# Altium PCB Lite Carrier for Mu.PcbDoc (part 12 of 15)
Units mm, origin at the board's own origin, x right, y up, seen from the top; angles counter-clockwise.
Board outline 146 x 102 mm, 20 copper layers (F.Cu, F.Mask, B.Cu, B.Mask, In1.Cu, F.SilkS, In2.Cu, B.SilkS, F.Adhes, B.Adhes, F.Paste, B.Paste, Dwgs.User, Cmts.User, Eco1.User, Eco2.User, Edge.Cuts, Margin, B.CrtYd, F.CrtYd); 254 components, 382 nets, 1258 pads, 1020 vias.
Unrouted connection lines stored in the file: 113.
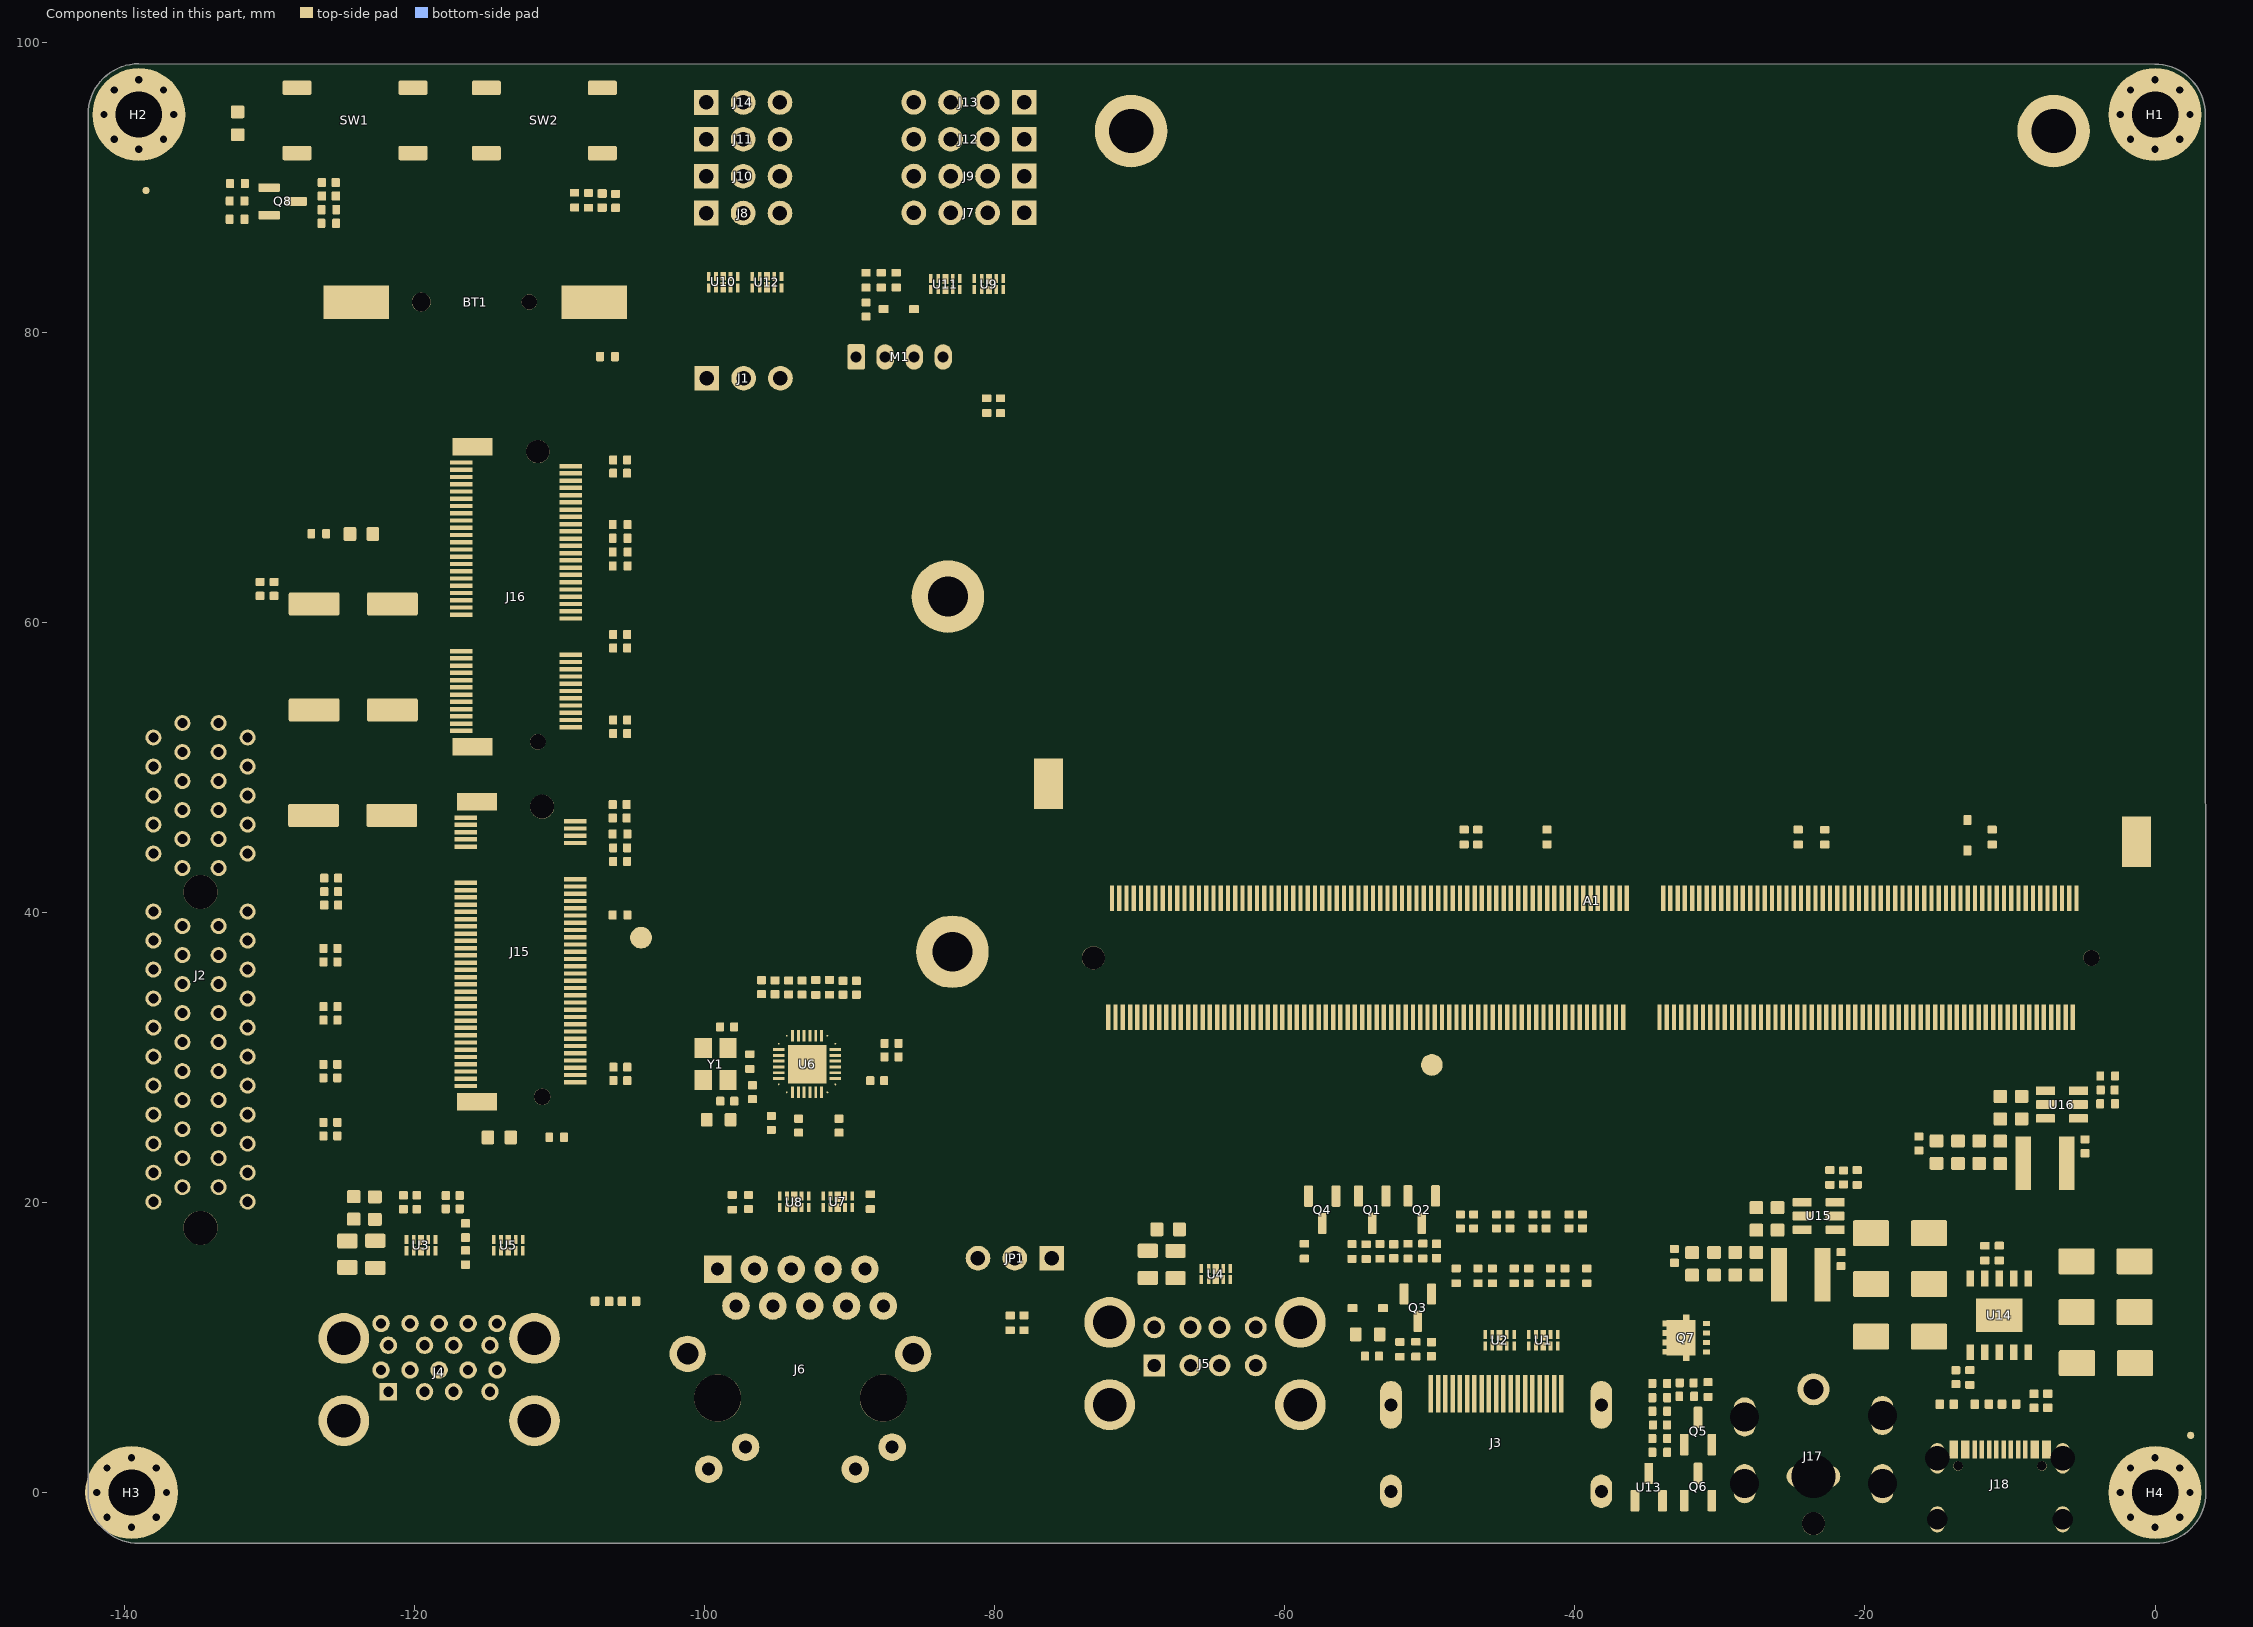
[diagram p22: the components of this part, seen from the top]

## Polygon pours and split planes (outlines as drawn) (continued)
+5V on F.Cu "F.Cu-+5V-1" (solid, remove dead copper, pour order 30970): -122.34,19.16 -126.19,19.16 -126.19,16.771 -126.18,16.77 -122.5,16.77 -122.34,16.93
+3V3 on F.Cu "F.Cu-+3V3-14" (solid, remove dead copper, pour order 30972): -9.13,23.12 -15.33,23.13 -16.1,23.58 -18.08,23.57 -18.07,21.39 -9.15,21.39 -9.14,21.38 -9.13,21.39
+15V on F.Cu "F.Cu-+15V-2" (solid, remove dead copper, pour order 30973): -8.59,2.955 -8.59,4.965 -7.455,6.1 -6.59,6.1 -6.59,6.45 -6.59,16.52 -3.47,16.49 -3.43,3.02
+12VA on F.Cu "F.Cu-+12VA" (solid, remove dead copper, pour order 30975): -33.413,23.054 -36.943,23.054 -36.95,9.1 -35.87,9.07 -32.07,9.07 -32.105,13.48 -33.41,13.48
+12VA on F.Cu "F.Cu-+12VA-2" (solid, remove dead copper, pour order 30976): 19 vertices, not listed, extent -139.1,50.5 -125.1,62.1
+3V3 on F.Cu "F.Cu-+3V3-20" (solid, remove dead copper, pour order 30977): -125.8,40.1 -125.8,48.8 -134.7,48.8 -134.7,47 -138.68,46.99 -138.68,44.09 -130.5,44.1 -129.1,44.1 -129.1,40.1
Net-(U15-SW) on F.Cu "F.Cu-Net-(U15-SW)" (solid, remove dead copper, pour order 30981): -21.47,15.995 -22.4,15.995 -22.41,16.705 -23.675,18.115 -25,18.115 -25,17.225 -23.51,15.355 -21.47,15.355
+3V3 on F.Cu "F.Cu-+3V3-78" (solid, remove dead copper, pour order 30984): -105.59,38.54 -105.59,37.54 -106.59,37.54 -106.59,38.54
+3V3 on F.Cu "F.Cu-+3V3-79" (solid, remove dead copper, pour order 30985): -91.19,38.73 -91.19,37.73 -92.19,37.73 -92.19,38.73
Net-(BT1-+) on F.Cu "F.Cu-Net-(BT1-+)-1" (solid, remove dead copper, pour order 30989): 24 vertices, not listed, extent -124.011,80.656 -121.336,82.071
GND on F.Cu "F.Cu-GND-43" (solid, remove dead copper, pour order 30993): 24 vertices, not listed, extent -86.93,92.515 -85.579,94.085
GND on F.Cu "F.Cu-GND-187" (solid, remove dead copper, pour order 30996): 24 vertices, not listed, extent -85.581,92.515 -84.23,94.085
GND on F.Cu "F.Cu-GND-94" (solid, remove dead copper, pour order 30999): 24 vertices, not listed, extent -86.928,92.515 -85.579,94.085
Net-(J6-CT) on F.Cu "F.Cu-Net-(J6-CT)-1" (solid, remove dead copper, pour order 31002): 24 vertices, not listed, extent -100.055,15.399 -98.155,16.85
Net-(J5-VBUS1) on F.Cu "F.Cu-Net-(J5-VBUS1)" (solid, remove dead copper, pour order 31005): 24 vertices, not listed, extent -69.311,8.452 -67.72,10.043
{\P\W\R\_\L\E\D\}\{\s\l\a\s\h\}\{PSON} on F.Cu "F.Cu-/~{PWR_LED}{slash}~{PSON}-5" (solid, remove dead copper, pour order 31008): 24 vertices, not listed, extent -77.327,14.903 -75.718,16.512
I2C2_SDA on F.Cu "F.Cu-/GPIO/I2C2_SDA-1" (solid, remove dead copper, pour order 31011): 24 vertices, not listed, extent -79.207,86.963 -77.598,88.572
GND on F.Cu "F.Cu-GND-113" (solid, remove dead copper, pour order 31014): 24 vertices, not listed, extent -99.881,92.44 -98.53,94.14
+12VA on F.Cu "F.Cu-+12VA-1" (solid, remove dead copper, pour order 31017): 24 vertices, not listed, extent -127.845,61.259 -126.228,62.56
MDI1- on F.Cu "F.Cu-/Gigabit Ethernet/MDI1--1" (solid, remove dead copper, pour order 31020): 24 vertices, not listed, extent -94.975,14.272 -93.661,15.4
SOC_UART0_RX on F.Cu "F.Cu-/GPIO/SOC_UART0_RX" (solid, remove dead copper, pour order 31023): 24 vertices, not listed, extent -100.63,86.86 -99.03,88.211
MDI1+ on F.Cu "F.Cu-/Gigabit Ethernet/MDI1+-1" (solid, remove dead copper, pour order 31026): 24 vertices, not listed, extent -96.173,12.859 -94.623,14.288
MDI2+ on F.Cu "F.Cu-/Gigabit Ethernet/MDI2+-1" (solid, remove dead copper, pour order 31029): 24 vertices, not listed, extent -93.633,12.859 -92.083,14.286
Net-(J5-VBUS2) on F.Cu "F.Cu-Net-(J5-VBUS2)-1" (solid, remove dead copper, pour order 31032): 24 vertices, not listed, extent -69.693,11.381 -68.307,12.632
GND on F.Cu "F.Cu-GND-102" (solid, remove dead copper, pour order 31035): 24 vertices, not listed, extent -62.693,11.381 -61.307,12.632
GND on F.Cu "F.Cu-GND-166" (solid, remove dead copper, pour order 31038): 24 vertices, not listed, extent -62.693,8.761 -61.307,10.012
GND on F.Cu "F.Cu-GND-96" (solid, remove dead copper, pour order 31041): 24 vertices, not listed, extent -62.693,10.132 -61.307,11.383
Net-(D26-A) on F.Cu "F.Cu-Net-(D26-A)-2" (solid, remove dead copper, pour order 31044): 24 vertices, not listed, extent -86.138,78.289 -84.962,79.653
+5V on F.Cu "F.Cu-+5V-12" (solid, remove dead copper, pour order 31047): 24 vertices, not listed, extent -88.138,78.289 -86.962,79.653
Net-(J4A-VBUS1) on F.Cu "F.Cu-Net-(J4A-VBUS1)" (solid, remove dead copper, pour order 31050): 24 vertices, not listed, extent -122.4,5.85 -121.2,6.951
Net-(J6-PadL3) on F.Cu "F.Cu-Net-(J6-PadL3)-1" (solid, remove dead copper, pour order 31053): 24 vertices, not listed, extent -97.176,3.129 -96.079,4.226
Net-(J6-PadL1) on F.Cu "F.Cu-Net-(J6-PadL1)-1" (solid, remove dead copper, pour order 31056): 24 vertices, not listed, extent -87.066,3.129 -85.969,4.226
Net-(J4B-VBUS2) on F.Cu "F.Cu-Net-(J4B-VBUS2)" (solid, remove dead copper, pour order 31059): 24 vertices, not listed, extent -122.924,9.376 -121.57,10.574
MDI2- on F.Cu "F.Cu-/Gigabit Ethernet/MDI2--1" (solid, remove dead copper, pour order 31062): 24 vertices, not listed, extent -92.363,14.262 -91.121,15.4
+5V on F.Cu "F.Cu-+5V-4" (solid, remove dead copper, pour order 31065): 24 vertices, not listed, extent -87.551,77.264 -86.524,78.548
{\P\L\T\_\R\S\T\}\ on F.Cu "F.Cu-/~{PLT_RST}-2" (solid, remove dead copper, pour order 31068): 24 vertices, not listed, extent -51.11,28.787 -49.859,30.173
{\P\L\T\_\R\S\T\}\ on F.Cu "F.Cu-/~{PLT_RST}-1" (solid, remove dead copper, pour order 31071): 24 vertices, not listed, extent -49.861,28.787 -48.61,30.173
MDI3+ on F.Cu "F.Cu-/Gigabit Ethernet/MDI3+" (solid, remove dead copper, pour order 31074): 24 vertices, not listed, extent -90.887,12.859 -89.543,14.31
MDI0+ on F.Cu "F.Cu-/Gigabit Ethernet/MDI0+" (solid, remove dead copper, pour order 31077): 24 vertices, not listed, extent -98.507,12.859 -97.163,14.292
MDI3- on F.Cu "F.Cu-/Gigabit Ethernet/MDI3-" (solid, remove dead copper, pour order 31080): 24 vertices, not listed, extent -90.006,14.45 -88.944,15.4
MDI0- on F.Cu "F.Cu-/Gigabit Ethernet/MDI0--1" (solid, remove dead copper, pour order 31083): 24 vertices, not listed, extent -97.515,14.332 -96.564,15.4
Net-(D25-A2) on F.Cu "F.Cu-Net-(D25-A2)-4" (solid, remove dead copper, pour order 31086): 24 vertices, not listed, extent -108.55,91.859 -107.049,92.821
Net-(D25-A2) on F.Cu "F.Cu-Net-(D25-A2)-1" (solid, remove dead copper, pour order 31089): 24 vertices, not listed, extent -115.051,91.859 -113.55,92.821
CON_USB1_D_P on F.Cu "F.Cu-/USB2.0&USB3.0/CON_USB1_D_P" (solid, remove dead copper, pour order 31092): 24 vertices, not listed, extent -65.449,8.475 -64.5,9.654
CON_USB2_D_P on F.Cu "F.Cu-/USB2.0&USB3.0/CON_USB2_D_P-2" (solid, remove dead copper, pour order 31095): 24 vertices, not listed, extent -65.449,11.095 -64.5,12.274
CON_USB2_D_N on F.Cu "F.Cu-/USB2.0&USB3.0/CON_USB2_D_N-4" (solid, remove dead copper, pour order 31098): 24 vertices, not listed, extent -66.5,11.095 -65.551,12.274
CON_USB1_D_N on F.Cu "F.Cu-/USB2.0&USB3.0/CON_USB1_D_N-4" (solid, remove dead copper, pour order 31101): 24 vertices, not listed, extent -66.5,8.475 -65.551,9.654
Net-(U6-CKXTAL1) on F.Cu "F.Cu-Net-(U6-CKXTAL1)" (solid, remove dead copper, pour order 31104): 24 vertices, not listed, extent -100.234,29.633 -99.078,30.888
GND on F.Cu "F.Cu-GND-68" (solid, remove dead copper, pour order 31107): 24 vertices, not listed, extent -101.109,28.17 -99.969,29.359
I2C5_SCL on F.Cu "F.Cu-/GPIO/I2C5_SCL-2" (solid, remove dead copper, pour order 31110): 24 vertices, not listed, extent -86.93,90.159 -85.569,91.361
SOC_UART2_RX on F.Cu "F.Cu-/GPIO/SOC_UART2_RX-2" (solid, remove dead copper, pour order 31113): 24 vertices, not listed, extent -95.808,87.202 -94.799,88.211
I2C4_SCL on F.Cu "F.Cu-/GPIO/I2C4_SCL-4" (solid, remove dead copper, pour order 31116): 24 vertices, not listed, extent -84.038,89.752 -83.029,90.761
SLS_S3 on F.Cu "F.Cu-/LattePanda Module/SLS_S3" (solid, remove dead copper, pour order 31119): 24 vertices, not listed, extent -82.158,15.152 -81.149,16.161
SOC_UART1_RX on F.Cu "F.Cu-/GPIO/SOC_UART1_RX-2" (solid, remove dead copper, pour order 31122): 24 vertices, not listed, extent -98.348,87.202 -97.339,88.211
SOC_UART2_TX on F.Cu "F.Cu-/GPIO/SOC_UART2_TX-4" (solid, remove dead copper, pour order 31125): 24 vertices, not listed, extent -94.801,90.149 -93.45,91.351
I2C3_SDA on F.Cu "F.Cu-/GPIO/I2C3_SDA-2" (solid, remove dead copper, pour order 31128): 24 vertices, not listed, extent -81.091,86.87 -79.889,88.221
SOC_UART1_TX on F.Cu "F.Cu-/GPIO/SOC_UART1_TX-4" (solid, remove dead copper, pour order 31131): 24 vertices, not listed, extent -97.341,89.742 -96.332,90.751
I2C4_SDA on F.Cu "F.Cu-/GPIO/I2C4_SDA-1" (solid, remove dead copper, pour order 31134): 24 vertices, not listed, extent -83.031,87.212 -82.022,88.221
I2C5_SDA on F.Cu "F.Cu-/GPIO/I2C5_SDA-2" (solid, remove dead copper, pour order 31137): 24 vertices, not listed, extent -85.571,87.212 -84.562,88.221
Net-(J15-DEVSLP) on F.Cu "F.Cu-Net-(J15-DEVSLP)" (solid, remove dead copper, pour order 31140): 24 vertices, not listed, extent -105.311,37.963 -104.379,39.12
Net-(D21-A2) on F.Cu "F.Cu-Net-(D21-A2)-2" (solid, remove dead copper, pour order 31143): 24 vertices, not listed, extent -121.6,91.859 -120.099,92.821
Net-(D21-A2) on F.Cu "F.Cu-Net-(D21-A2)-4" (solid, remove dead copper, pour order 31146): 24 vertices, not listed, extent -128.101,91.859 -126.6,92.821
GND on F.Cu "F.Cu-GND-176" (solid, remove dead copper, pour order 31149): 24 vertices, not listed, extent -7.328,2.074 -6.369,3.255
GND on F.Cu "F.Cu-GND-132" (solid, remove dead copper, pour order 31152): 24 vertices, not listed, extent -15.011,2.079 -14.063,3.255
+5V on F.Cu "F.Cu-+5V-2" (solid, remove dead copper, pour order 31155): 24 vertices, not listed, extent -68.717,16.17 -67.529,17.09
+5V on F.Cu "F.Cu-+5V" (solid, remove dead copper, pour order 31158): 24 vertices, not listed, extent -69.441,16.18 -68.253,17.094
GND on F.Cu "F.Cu-GND-150" (solid, remove dead copper, pour order 31161): 24 vertices, not listed, extent -116.489,51.409 -115.266,52.51
Net-(D21-A2) on F.Cu "F.Cu-Net-(D21-A2)-1" (solid, remove dead copper, pour order 31164): 24 vertices, not listed, extent -128.282,91.433 -127.033,92.341
Net-(M1-PWM) on F.Cu "F.Cu-Net-(M1-PWM)-1" (solid, remove dead copper, pour order 31167): 24 vertices, not listed, extent -83.883,77 -82.962,78.291
Net-(J5-VBUS2) on F.Cu "F.Cu-Net-(J5-VBUS2)" (solid, remove dead copper, pour order 31170): 24 vertices, not listed, extent -69.755,13.818 -68.75,14.794
+5V on F.Cu "F.Cu-+5V-6" (solid, remove dead copper, pour order 31173): 24 vertices, not listed, extent -69.762,16.666 -68.763,17.642
Net-(D25-A2) on F.Cu "F.Cu-Net-(D25-A2)-2" (solid, remove dead copper, pour order 31176): 24 vertices, not listed, extent -108.043,91.416 -106.843,92.341
GND on F.Cu "F.Cu-GND-157" (solid, remove dead copper, pour order 31179): 24 vertices, not listed, extent -115.9,6.396 -114.799,7.504
GND on F.Cu "F.Cu-GND-30" (solid, remove dead copper, pour order 31182): 24 vertices, not listed, extent -98.985,30.639 -97.899,31.828
+5V on F.Cu "F.Cu-+5V-7" (solid, remove dead copper, pour order 31185): 24 vertices, not listed, extent -69.275,17.215 -68.449,18.191
CON_USB4_SSTX_N on F.Cu "F.Cu-/USB2.0&USB3.0/CON_USB4_SSTX_N-2" (solid, remove dead copper, pour order 31188): 24 vertices, not listed, extent -121.138,11.42 -120.07,12.488
CON_USB4_SSRX_N on F.Cu "F.Cu-/USB2.0&USB3.0/CON_USB4_SSRX_N-3" (solid, remove dead copper, pour order 31191): 24 vertices, not listed, extent -115.138,11.42 -114.07,12.488
CON_USB4_SSRX_P on F.Cu "F.Cu-/USB2.0&USB3.0/CON_USB4_SSRX_P-2" (solid, remove dead copper, pour order 31194): 24 vertices, not listed, extent -116.53,11.42 -115.462,12.488
CON_USB4_SSTX_P on F.Cu "F.Cu-/USB2.0&USB3.0/CON_USB4_SSTX_P-4" (solid, remove dead copper, pour order 31196): 24 vertices, not listed, extent -122.53,11.42 -121.462,12.488
CON_USB3_D_P on F.Cu "F.Cu-/USB2.0&USB3.0/CON_USB3_D_P-2" (solid, remove dead copper, pour order 31198): 24 vertices, not listed, extent -118.138,6.112 -117.07,7.18
CON_USB3_D_N on F.Cu "F.Cu-/USB2.0&USB3.0/CON_USB3_D_N-2" (solid, remove dead copper, pour order 31200): 24 vertices, not listed, extent -119.53,6.112 -118.462,7.18
Net-(U6-CKXTAL2) on F.Cu "F.Cu-Net-(U6-CKXTAL2)-2" (solid, remove dead copper, pour order 31202): 24 vertices, not listed, extent -98.771,27.24 -97.785,28.441
Net-(J5-VBUS1) on F.Cu "F.Cu-Net-(J5-VBUS1)-1" (solid, remove dead copper, pour order 31204): 24 vertices, not listed, extent -68.017,13.808 -67.042,14.783
Net-(U6-CKXTAL2) on F.Cu "F.Cu-Net-(U6-CKXTAL2)-1" (solid, remove dead copper, pour order 31206): 24 vertices, not listed, extent -98.386,28.081 -97.285,29.14
REFCLK2- on F.Cu "F.Cu-/LattePanda Module/REFCLK2-" (solid, remove dead copper, pour order 31208): 24 vertices, not listed, extent -131.71,37.84 -130.752,38.863
REFCLK2+ on F.Cu "F.Cu-/LattePanda Module/REFCLK2+-2" (solid, remove dead copper, pour order 31210): 24 vertices, not listed, extent -133.501,38.542 -132.45,39.558
5V_HDMI_VCC on F.Cu "F.Cu-5V_HDMI_VCC" (solid, remove dead copper, pour order 31212): 24 vertices, not listed, extent -53.758,10.848 -52.981,11.77
PCIE30_TX1_N on F.Cu "F.Cu-/PCIe x4/PCIE30_TX1_N" (solid, remove dead copper, pour order 31214): 24 vertices, not listed, extent -138.001,31.542 -136.97,32.558
Net-(J3-+5V) on F.Cu "F.Cu-Net-(J3-+5V)" (solid, remove dead copper, pour order 31216): 24 vertices, not listed, extent -55.238,10.02 -54.355,11.043
GND on F.Cu "F.Cu-GND-126" (solid, remove dead copper, pour order 31218): 24 vertices, not listed, extent -118.301,7.896 -117.246,8.874
CON_USB4_D_N on F.Cu "F.Cu-/USB2.0&USB3.0/CON_USB4_D_N" (solid, remove dead copper, pour order 31220): 24 vertices, not listed, extent -119.854,10.149 -118.876,11.228
CON_USB4_D_P on F.Cu "F.Cu-/USB2.0&USB3.0/CON_USB4_D_P-2" (solid, remove dead copper, pour order 31222): 24 vertices, not listed, extent -118.364,9.726 -117.299,10.704
Net-(D23-A) on F.Cu "F.Cu-Net-(D23-A)" (solid, remove dead copper, pour order 31224): 24 vertices, not listed, extent -125.323,65.65 -124.446,66.525
5V_HDMI_VCC on F.Cu "F.Cu-5V_HDMI_VCC-1" (solid, remove dead copper, pour order 31226): 24 vertices, not listed, extent -53.845,10.025 -53.075,10.901
Net-(D22-K) on F.Cu "F.Cu-Net-(D22-K)" (solid, remove dead copper, pour order 31228): 24 vertices, not listed, extent -132.371,92.834 -131.421,93.746
Net-(D9-K) on F.Cu "F.Cu-Net-(D9-K)-1" (solid, remove dead copper, pour order 31230): 24 vertices, not listed, extent -115.055,24.278 -114.132,25.178
PCIE30_TX0_P on F.Cu "F.Cu-/PCIe x4/PCIE30_TX0_P-1" (solid, remove dead copper, pour order 31232): 24 vertices, not listed, extent -138.001,37.661 -136.98,38.558
PCIE30_TX2_N on F.Cu "F.Cu-/PCIe x4/PCIE30_TX2_N" (solid, remove dead copper, pour order 31234): 24 vertices, not listed, extent -138.001,27.542 -136.983,28.439
PCIE30_TX3_N on F.Cu "F.Cu-/PCIe x4/PCIE30_TX3_N-1" (solid, remove dead copper, pour order 31236): 24 vertices, not listed, extent -138.001,23.542 -136.987,24.439
PCIE30_TX0_N on F.Cu "F.Cu-/PCIe x4/PCIE30_TX0_N-1" (solid, remove dead copper, pour order 31238): 24 vertices, not listed, extent -136.968,36.661 -135.999,37.558
Net-(D9-A) on F.Cu "F.Cu-Net-(D9-A)" (solid, remove dead copper, pour order 31240): 24 vertices, not listed, extent -113.363,24.042 -112.487,24.917
GND on F.Cu "F.Cu-GND-77" (solid, remove dead copper, pour order 31242): 24 vertices, not listed, extent -5.344,26.226 -4.27,26.786
PCIE30_TX2_P on F.Cu "F.Cu-/PCIe x4/PCIE30_TX2_P-1" (solid, remove dead copper, pour order 31244): 24 vertices, not listed, extent -136.905,28.542 -135.999,29.439
Net-(D22-A) on F.Cu "F.Cu-Net-(D22-A)-1" (solid, remove dead copper, pour order 31246): 24 vertices, not listed, extent -133.102,94.757 -132.189,95.598
PCIE30_TX1_P on F.Cu "F.Cu-/PCIe x4/PCIE30_TX1_P-1" (solid, remove dead copper, pour order 31248): 24 vertices, not listed, extent -136.878,32.542 -135.999,33.439
PCIE30_TX3_P on F.Cu "F.Cu-/PCIe x4/PCIE30_TX3_P-1" (solid, remove dead copper, pour order 31250): 24 vertices, not listed, extent -136.843,24.542 -135.999,25.439
Net-(Q5-D) on F.Cu "F.Cu-Net-(Q5-D)-1" (solid, remove dead copper, pour order 31252): 24 vertices, not listed, extent -31.644,5.145 -31.196,6.217
Net-(Q5-G) on F.Cu "F.Cu-Net-(Q5-G)-3" (solid, remove dead copper, pour order 31254): 24 vertices, not listed, extent -32.762,3.272 -32.317,4.342
Net-(Q4-D) on F.Cu "F.Cu-Net-(Q4-D)-3" (solid, remove dead copper, pour order 31256): 24 vertices, not listed, extent -57.703,17.393 -57.129,18.563
DDC_SCL on F.Cu "F.Cu-/HDMI/DDC_SCL-1" (solid, remove dead copper, pour order 31258): 24 vertices, not listed, extent -50.849,17.535 -50.271,18.573
Net-(Q1-D) on F.Cu "F.Cu-Net-(Q1-D)-1" (solid, remove dead copper, pour order 31260): 24 vertices, not listed, extent -54.259,17.532 -53.681,18.571
DDI_B_HPD on F.Cu "F.Cu-/HDMI/DDI_B_HPD" (solid, remove dead copper, pour order 31262): 24 vertices, not listed, extent -55.209,19.407 -54.631,20.446
Net-(U13-K) on F.Cu "F.Cu-Net-(U13-K)" (solid, remove dead copper, pour order 31264): 24 vertices, not listed, extent -36.135,-0.566 -35.571,0.473
DDI_B_DDC_SCL on F.Cu "F.Cu-/HDMI/DDI_B_DDC_SCL" (solid, remove dead copper, pour order 31266): 24 vertices, not listed, extent -51.799,20.446 -51.221,21.485
DDI_B_DDC_SCL on F.Cu "F.Cu-/HDMI/DDI_B_DDC_SCL-1" (solid, remove dead copper, pour order 31268): 24 vertices, not listed, extent -51.799,19.41 -51.221,20.448
DDC_SDA on F.Cu "F.Cu-/HDMI/DDC_SDA-2" (solid, remove dead copper, pour order 31270): 24 vertices, not listed, extent -51.124,10.775 -50.546,11.813
PWR_EN on F.Cu "F.Cu-/PSU/PWR_EN-7" (solid, remove dead copper, pour order 31272): 24 vertices, not listed, extent -32.749,-0.556 -32.171,0.483
+3V3 on F.Cu "F.Cu-+3V3-53" (solid, remove dead copper, pour order 31274): 24 vertices, not listed, extent -49.899,20.446 -49.321,21.485
Net-(U13-REF) on F.Cu "F.Cu-Net-(U13-REF)-1" (solid, remove dead copper, pour order 31276): 24 vertices, not listed, extent -34.249,-0.566 -33.671,0.473
+3V3 on F.Cu "F.Cu-+3V3-22" (solid, remove dead copper, pour order 31278): 24 vertices, not listed, extent -49.899,19.41 -49.321,20.448
+3V3 on F.Cu "F.Cu-+3V3-56" (solid, remove dead copper, pour order 31280): 24 vertices, not listed, extent -53.309,19.407 -52.731,20.446
+3V3 on F.Cu "F.Cu-+3V3-31" (solid, remove dead copper, pour order 31282): 24 vertices, not listed, extent -50.174,12.65 -49.596,13.688
Net-(U6-RSET) on F.Cu "F.Cu-Net-(U6-RSET)" (solid, remove dead copper, pour order 31284): 24 vertices, not listed, extent -98.211,25.3 -97.41,26.1
DDI_B_DDC_SDA on F.Cu "F.Cu-/HDMI/DDI_B_DDC_SDA-1" (solid, remove dead copper, pour order 31286): 24 vertices, not listed, extent -52.074,12.65 -51.517,13.688
Net-(Q5-S) on F.Cu "F.Cu-Net-(Q5-S)" (solid, remove dead copper, pour order 31288): 24 vertices, not listed, extent -30.816,2.196 -30.271,3.303
HPD on F.Cu "F.Cu-/HDMI/HPD-4" (solid, remove dead copper, pour order 31290): 24 vertices, not listed, extent -50.234,6.797 -49.929,8.299
Net-(U16-FB) on F.Cu "F.Cu-Net-(U16-FB)-2" (solid, remove dead copper, pour order 31292): 24 vertices, not listed, extent -5.283,27.433 -4.32,27.986
Net-(U15-FB) on F.Cu "F.Cu-Net-(U15-FB)-2" (solid, remove dead copper, pour order 31294): 24 vertices, not listed, extent -22.187,20.014 -21.409,20.669
GND on F.Cu "F.Cu-GND-121" (solid, remove dead copper, pour order 31296): 24 vertices, not listed, extent -34.911,1.186 -34.259,1.996
GND on F.Cu "F.Cu-GND-158" (solid, remove dead copper, pour order 31298): 24 vertices, not listed, extent -35.175,4.045 -34.511,4.769
+3V3 on F.Cu "F.Cu-+3V3-64" (solid, remove dead copper, pour order 31300): 24 vertices, not listed, extent -106.92,45.91 -106.244,46.616
Net-(J6-CT) on F.Cu "F.Cu-Net-(J6-CT)" (solid, remove dead copper, pour order 31302): 24 vertices, not listed, extent -97.56,18.96 -96.854,19.636
+5V on F.Cu "F.Cu-+5V-8" (solid, remove dead copper, pour order 31304): 24 vertices, not listed, extent -88.261,80.989 -87.546,81.629
+5V on F.Cu "F.Cu-+5V-10" (solid, remove dead copper, pour order 31306): 24 vertices, not listed, extent -87.774,81.551 -87.059,82.191
GND on F.Cu "F.Cu-GND-45" (solid, remove dead copper, pour order 31308): 24 vertices, not listed, extent -105.446,46.377 -104.764,47.066
Net-(D26-A) on F.Cu "F.Cu-Net-(D26-A)-1" (solid, remove dead copper, pour order 31310): 24 vertices, not listed, extent -86.891,83.533 -86.173,84.169
Net-(U16-BOOST) on F.Cu "F.Cu-Net-(U16-BOOST)-1" (solid, remove dead copper, pour order 31312): 24 vertices, not listed, extent -5.421,25.261 -4.63,25.799
Net-(U15-BOOST) on F.Cu "F.Cu-Net-(U15-BOOST)-1" (solid, remove dead copper, pour order 31314): 24 vertices, not listed, extent -22.218,17.553 -21.47,18.116
GND on F.Cu "F.Cu-GND-120" (solid, remove dead copper, pour order 31316): 24 vertices, not listed, extent -125.54,40.502 -124.98,41.093
+3V3 on F.Cu "F.Cu-+3V3-37" (solid, remove dead copper, pour order 31318): 24 vertices, not listed, extent -126.5,40.502 -125.94,41.093
GND on F.Cu "F.Cu-GND-12" (solid, remove dead copper, pour order 31320): 24 vertices, not listed, extent -105.65,46.499 -105.09,47.09
+3V3 on F.Cu "F.Cu-+3V3-24" (solid, remove dead copper, pour order 31322): 24 vertices, not listed, extent -106.58,52.329 -106.02,52.92
+3V3 on F.Cu "F.Cu-+3V3-55" (solid, remove dead copper, pour order 31324): 24 vertices, not listed, extent -126.5,41.76 -125.94,42.351
+3V3 on F.Cu "F.Cu-+3V3-57" (solid, remove dead copper, pour order 31326): 24 vertices, not listed, extent -106.58,52.67 -106.02,53.261
+3V3 on F.Cu "F.Cu-+3V3-43" (solid, remove dead copper, pour order 31328): 24 vertices, not listed, extent -106.61,46.499 -106.05,47.09
+3V3 on F.Cu "F.Cu-+3V3-7" (solid, remove dead copper, pour order 31330): 24 vertices, not listed, extent -106.57,28.73 -106.01,29.321
+3V3 on F.Cu "F.Cu-+3V3-21" (solid, remove dead copper, pour order 31332): 24 vertices, not listed, extent -106.57,28.399 -106.01,28.99
GND on F.Cu "F.Cu-GND-83" (solid, remove dead copper, pour order 31334): 24 vertices, not listed, extent -105.65,46.84 -105.09,47.431
GND on F.Cu "F.Cu-GND-178" (solid, remove dead copper, pour order 31336): 24 vertices, not listed, extent -125.54,41.76 -124.98,42.351
Net-(Q8-G) on F.Cu "F.Cu-Net-(Q8-G)" (solid, remove dead copper, pour order 31338): 24 vertices, not listed, extent -131.047,89.671 -130.019,90.149
DDI_B_HPD on F.Cu "F.Cu-/HDMI/DDI_B_HPD-4" (solid, remove dead copper, pour order 31340): 24 vertices, not listed, extent -54.921,20.321 -54.334,21.131
DDI_B_DDC_SDA on F.Cu "F.Cu-/HDMI/DDI_B_DDC_SDA" (solid, remove dead copper, pour order 31342): 24 vertices, not listed, extent -51.786,13.542 -51.194,14.3
+5V on F.Cu "F.Cu-+5V-5" (solid, remove dead copper, pour order 31344): 24 vertices, not listed, extent -88.871,80.8 -88.28,81.36
Net-(Q5-S) on F.Cu "F.Cu-Net-(Q5-S)-1" (solid, remove dead copper, pour order 31346): 24 vertices, not listed, extent -31.511,1.196 -30.927,2.006
Net-(J3-+5V) on F.Cu "F.Cu-Net-(J3-+5V)-1" (solid, remove dead copper, pour order 31348): 24 vertices, not listed, extent -49.58,5.355 -49.28,6.806
FAN_1_TAC on F.Cu "F.Cu-/Fan_Temp/FAN_1_TAC-2" (solid, remove dead copper, pour order 31350): 24 vertices, not listed, extent -88.41,82.8 -87.819,83.34
Net-(D26-A) on F.Cu "F.Cu-Net-(D26-A)-4" (solid, remove dead copper, pour order 31352): 24 vertices, not listed, extent -87.38,83.82 -86.789,84.36
Net-(U15-FB) on F.Cu "F.Cu-Net-(U15-FB)-1" (solid, remove dead copper, pour order 31354): 24 vertices, not listed, extent -21.13,20.94 -20.539,21.48
+5V on F.Cu "F.Cu-+5V-9" (solid, remove dead copper, pour order 31356): 24 vertices, not listed, extent -22.421,21.96 -21.83,22.5
Net-(U15-FB) on F.Cu "F.Cu-Net-(U15-FB)" (solid, remove dead copper, pour order 31358): 24 vertices, not listed, extent -22.421,20.94 -21.83,21.48
Net-(D26-A) on F.Cu "F.Cu-Net-(D26-A)-3" (solid, remove dead copper, pour order 31360): 24 vertices, not listed, extent -87.821,83.82 -87.23,84.36
Net-(U14-VBUS) on F.Cu "F.Cu-Net-(U14-VBUS)" (solid, remove dead copper, pour order 31362): 24 vertices, not listed, extent -10.995,14.769 -10.485,15.575
Net-(U14-CFG1) on F.Cu "F.Cu-Net-(U14-CFG1)" (solid, remove dead copper, pour order 31364): 24 vertices, not listed, extent -11.995,14.769 -11.485,15.575
Net-(U14-VDD) on F.Cu "F.Cu-Net-(U14-VDD)-3" (solid, remove dead copper, pour order 31366): 24 vertices, not listed, extent -12.995,8.865 -12.485,9.671
TMDS_D2- on F.Cu "F.Cu-/HDMI/TMDS_D2--2" (solid, remove dead copper, pour order 31368): 24 vertices, not listed, extent -42.08,6.804 -41.78,8.255
TMDS_D0- on F.Cu "F.Cu-/HDMI/TMDS_D0--2" (solid, remove dead copper, pour order 31370): 24 vertices, not listed, extent -45.08,6.804 -44.78,8.255
TMDS_CK- on F.Cu "F.Cu-/HDMI/TMDS_CK--7" (solid, remove dead copper, pour order 31372): 24 vertices, not listed, extent -46.58,6.804 -46.28,8.255
TMDS_D0+ on F.Cu "F.Cu-/HDMI/TMDS_D0+" (solid, remove dead copper, pour order 31374): 24 vertices, not listed, extent -44.08,6.804 -43.78,8.255
TMDS_D1- on F.Cu "F.Cu-/HDMI/TMDS_D1--5" (solid, remove dead copper, pour order 31376): 24 vertices, not listed, extent -43.58,6.804 -43.28,8.255
TMDS_CK+ on F.Cu "F.Cu-/HDMI/TMDS_CK+-3" (solid, remove dead copper, pour order 31378): 24 vertices, not listed, extent -45.58,6.804 -45.28,8.255
DDC_SDA on F.Cu "F.Cu-/HDMI/DDC_SDA-1" (solid, remove dead copper, pour order 31380): 24 vertices, not listed, extent -48.58,6.804 -48.28,8.255
TMDS_D2+ on F.Cu "F.Cu-/HDMI/TMDS_D2+" (solid, remove dead copper, pour order 31381): 24 vertices, not listed, extent -41.08,6.804 -40.78,8.255
TMDS_D1+ on F.Cu "F.Cu-/HDMI/TMDS_D1+" (solid, remove dead copper, pour order 31382): 24 vertices, not listed, extent -42.58,6.804 -42.28,8.255
GND on F.Cu "F.Cu-GND-175" (solid, remove dead copper, pour order 31383): 24 vertices, not listed, extent -49.08,6.804 -48.78,8.255
DDC_SCL on F.Cu "F.Cu-/HDMI/DDC_SCL" (solid, remove dead copper, pour order 31384): 24 vertices, not listed, extent -48.08,6.804 -47.78,8.255
GND on F.Cu "F.Cu-GND-137" (solid, remove dead copper, pour order 31385): 24 vertices, not listed, extent -43.08,5.355 -42.78,6.806
GND on F.Cu "F.Cu-GND-14" (solid, remove dead copper, pour order 31386): 24 vertices, not listed, extent -44.58,5.355 -44.28,6.806
GND on F.Cu "F.Cu-GND-125" (solid, remove dead copper, pour order 31387): 24 vertices, not listed, extent -46.08,5.355 -45.78,6.806
GND on F.Cu "F.Cu-GND-141" (solid, remove dead copper, pour order 31388): 24 vertices, not listed, extent -49.08,5.355 -48.78,6.806
GND on F.Cu "F.Cu-GND-170" (solid, remove dead copper, pour order 31389): 24 vertices, not listed, extent -41.58,5.355 -41.28,6.806
+3V3 on F.Cu "F.Cu-+3V3-40" (solid, remove dead copper, pour order 31390): 24 vertices, not listed, extent -106.85,28.08 -106.289,28.629
CC1 on F.Cu "F.Cu-/PSU/CC1-4" (solid, remove dead copper, pour order 31391): 24 vertices, not listed, extent -9.995,14.769 -9.485,15.575
CC2 on F.Cu "F.Cu-/PSU/CC2-3" (solid, remove dead copper, pour order 31392): 24 vertices, not listed, extent -8.995,13.965 -8.485,14.771
PWR_C_D- on F.Cu "F.Cu-/PSU/PWR_C_D--3" (solid, remove dead copper, pour order 31393): 24 vertices, not listed, extent -8.995,8.865 -8.485,9.671
PWR_C_D+ on F.Cu "F.Cu-/PSU/PWR_C_D+-1" (solid, remove dead copper, pour order 31394): 24 vertices, not listed, extent -9.995,8.865 -9.485,9.671
GND on F.Cu "F.Cu-GND-165" (solid, remove dead copper, pour order 31395): 24 vertices, not listed, extent -35.041,4.58 -34.477,5.251
Net-(U15-BOOST) on F.Cu "F.Cu-Net-(U15-BOOST)" (solid, remove dead copper, pour order 31396): 24 vertices, not listed, extent -21.944,16.569 -21.384,17.13
GND on F.Cu "F.Cu-GND-50" (solid, remove dead copper, pour order 31397): 24 vertices, not listed, extent -96.975,26.56 -96.415,27.121
Net-(U16-BOOST) on F.Cu "F.Cu-Net-(U16-BOOST)" (solid, remove dead copper, pour order 31398): 24 vertices, not listed, extent -5.11,24.349 -4.55,24.91
GND on F.Cu "F.Cu-GND-95" (solid, remove dead copper, pour order 31399): 24 vertices, not listed, extent -105.371,47.15 -104.81,47.71
GND on F.Cu "F.Cu-GND-42" (solid, remove dead copper, pour order 31400): 24 vertices, not listed, extent -105.341,52.98 -104.78,53.54
GND on F.Cu "F.Cu-GND-106" (solid, remove dead copper, pour order 31401): 24 vertices, not listed, extent -105.341,52.05 -104.78,52.61
Net-(U13-K) on F.Cu "F.Cu-Net-(U13-K)-3" (solid, remove dead copper, pour order 31402): 24 vertices, not listed, extent -35.191,6.011 -34.598,6.654
Net-(Q5-D) on F.Cu "F.Cu-Net-(Q5-D)" (solid, remove dead copper, pour order 31403): 24 vertices, not listed, extent -31.351,6.061 -30.708,6.654
HPD on F.Cu "F.Cu-/HDMI/HPD-1" (solid, remove dead copper, pour order 31404): 24 vertices, not listed, extent -52.859,15.561 -52.316,16.184
GND on F.Cu "F.Cu-GND-128" (solid, remove dead copper, pour order 31405): 24 vertices, not listed, extent -49.832,15.576 -49.242,16.167
GND on F.Cu "F.Cu-GND-41" (solid, remove dead copper, pour order 31406): 24 vertices, not listed, extent -99.011,31.58 -98.405,32.216
+3V3 on F.Cu "F.Cu-+3V3-71" (solid, remove dead copper, pour order 31407): 24 vertices, not listed, extent -89.101,28.273 -88.495,28.907
CON_USB3_D_N on F.Cu "F.Cu-/USB2.0&USB3.0/CON_USB3_D_N" (solid, remove dead copper, pour order 31408): 24 vertices, not listed, extent -106.089,12.632 -105.536,13.258
CON_USB3_D_P on F.Cu "F.Cu-/USB2.0&USB3.0/CON_USB3_D_P-1" (solid, remove dead copper, pour order 31409): 24 vertices, not listed, extent -106.744,12.632 -106.191,13.258
CON_USB3_D_N on F.Cu "F.Cu-/USB2.0&USB3.0/CON_USB3_D_N-1" (solid, remove dead copper, pour order 31410): 24 vertices, not listed, extent -106.089,13.102 -105.536,13.728
CON_USB3_D_P on F.Cu "F.Cu-/USB2.0&USB3.0/CON_USB3_D_P" (solid, remove dead copper, pour order 31411): 24 vertices, not listed, extent -106.744,13.102 -106.191,13.728
Net-(D26-A) on F.Cu "F.Cu-Net-(D26-A)-5" (solid, remove dead copper, pour order 31412): 24 vertices, not listed, extent -85.835,81.04 -85.285,81.591
Net-(D26-A) on F.Cu "F.Cu-Net-(D26-A)" (solid, remove dead copper, pour order 31413): 24 vertices, not listed, extent -85.835,81.589 -85.285,82.14
DDC_SCL on F.Cu "F.Cu-/HDMI/DDC_SCL-5" (solid, remove dead copper, pour order 31414): 24 vertices, not listed, extent -50.153,16.852 -49.537,17.42
+3V3 on F.Cu "F.Cu-+3V3-23" (solid, remove dead copper, pour order 31415): 24 vertices, not listed, extent -106.757,52.21 -106.22,52.885
DDC_SCL on F.Cu "F.Cu-/HDMI/DDC_SCL-2" (solid, remove dead copper, pour order 31416): 24 vertices, not listed, extent -49.617,16.759 -48.939,17.293
+5V on F.Cu "F.Cu-+5V-3" (solid, remove dead copper, pour order 31417): 24 vertices, not listed, extent -87.06,82.53 -86.52,83.071
PWR_C_D+ on F.Cu "F.Cu-/PSU/PWR_C_D+-2" (solid, remove dead copper, pour order 31418): 24 vertices, not listed, extent -10.839,6.089 -10.271,6.705
PWR_C_D- on F.Cu "F.Cu-/PSU/PWR_C_D-" (solid, remove dead copper, pour order 31419): 24 vertices, not listed, extent -11.739,6.089 -11.171,6.705
PWR_C_D- on F.Cu "F.Cu-/PSU/PWR_C_D--7" (solid, remove dead copper, pour order 31420): 24 vertices, not listed, extent -11.739,5.475 -11.171,6.091
PWR_C_D+ on F.Cu "F.Cu-/PSU/PWR_C_D+" (solid, remove dead copper, pour order 31421): 24 vertices, not listed, extent -10.839,5.475 -10.271,6.091
Net-(Q4-D) on F.Cu "F.Cu-Net-(Q4-D)-4" (solid, remove dead copper, pour order 31422): 24 vertices, not listed, extent -39.297,15.388 -38.671,15.964
TMDS_D0- on F.Cu "F.Cu-/HDMI/TMDS_D0-" (solid, remove dead copper, pour order 31423): 24 vertices, not listed, extent -45.797,14.368 -45.171,14.944
TMDS_D0+ on F.Cu "F.Cu-/HDMI/TMDS_D0+-4" (solid, remove dead copper, pour order 31424): 24 vertices, not listed, extent -44.699,14.368 -44.073,14.944
{\R\S\T\_\S\W\}\ on F.Cu "F.Cu-/LattePanda Module/~{RST_SW}-2" (solid, remove dead copper, pour order 31425): 24 vertices, not listed, extent -108.112,88.058 -107.488,88.632
Net-(J16-{\W\_\D\I\S\A\B\L\E\1\}\)\ on F.Cu "F.Cu-Net-(J16-~{W_DISABLE1})" (solid, remove dead copper, pour order 31426): 24 vertices, not listed, extent -106.842,66.218 -106.268,66.842
Net-(J15-SUSCLK) on F.Cu "F.Cu-Net-(J15-SUSCLK)" (solid, remove dead copper, pour order 31427): 24 vertices, not listed, extent -106.852,44.888 -106.278,45.512
Net-(M1-PWM) on F.Cu "F.Cu-Net-(M1-PWM)" (solid, remove dead copper, pour order 31428): 24 vertices, not listed, extent -81.062,74.358 -80.438,74.932
VPullup on F.Cu "F.Cu-VPullup-6" (solid, remove dead copper, pour order 31429): 24 vertices, not listed, extent -11.742,45.638 -11.118,46.212
Net-(J6-PadL3) on F.Cu "F.Cu-Net-(J6-PadL3)" (solid, remove dead copper, pour order 31430): 24 vertices, not listed, extent -98.602,18.988 -97.978,19.562
PWR_EN on F.Cu "F.Cu-/PSU/PWR_EN-2" (solid, remove dead copper, pour order 31431): 24 vertices, not listed, extent -24.66,20.014 -24.058,20.615
PWR_EN on F.Cu "F.Cu-/PSU/PWR_EN-3" (solid, remove dead copper, pour order 31432): 24 vertices, not listed, extent -7.853,27.697 -7.252,28.297
GND on F.Cu "F.Cu-GND-190" (solid, remove dead copper, pour order 31433): 24 vertices, not listed, extent -105.311,63.61 -104.77,64.15
Net-(Q5-G) on F.Cu "F.Cu-Net-(Q5-G)-1" (solid, remove dead copper, pour order 31434): 24 vertices, not listed, extent -33.919,4.661 -33.381,5.252
Net-(Q7-G) on F.Cu "F.Cu-Net-(Q7-G)-3" (solid, remove dead copper, pour order 31435): 24 vertices, not listed, extent -32.079,7.561 -31.541,8.153
Net-(Q7-G) on F.Cu "F.Cu-Net-(Q7-G)-4" (solid, remove dead copper, pour order 31436): 24 vertices, not listed, extent -32.079,6.973 -31.541,7.564
CON_USB4_D_P on F.Cu "F.Cu-/USB2.0&USB3.0/CON_USB4_D_P-4" (solid, remove dead copper, pour order 31437): 24 vertices, not listed, extent -117.028,16.529 -116.401,17.083
CON_USB4_D_P on F.Cu "F.Cu-/USB2.0&USB3.0/CON_USB4_D_P-3" (solid, remove dead copper, pour order 31438): 24 vertices, not listed, extent -116.559,16.529 -115.932,17.083
CON_USB4_D_N on F.Cu "F.Cu-/USB2.0&USB3.0/CON_USB4_D_N-2" (solid, remove dead copper, pour order 31439): 24 vertices, not listed, extent -116.559,17.185 -115.932,17.739
+3V3 on F.Cu "F.Cu-+3V3-70" (solid, remove dead copper, pour order 31440): 24 vertices, not listed, extent -106.599,46.499 -106.061,47.09
+3V3 on F.Cu "F.Cu-+3V3-66" (solid, remove dead copper, pour order 31441): 24 vertices, not listed, extent -106.569,70.269 -106.031,70.86
+3V3 on F.Cu "F.Cu-+3V3-45" (solid, remove dead copper, pour order 31442): 24 vertices, not listed, extent -106.569,70.6 -106.031,71.191
+3V3 on F.Cu "F.Cu-+3V3-12" (solid, remove dead copper, pour order 31443): 24 vertices, not listed, extent -106.599,46.84 -106.061,47.431
TMDS_D1+ on F.Cu "F.Cu-/HDMI/TMDS_D1+-7" (solid, remove dead copper, pour order 31444): 24 vertices, not listed, extent -42.163,14.383 -41.564,14.958
TMDS_D2+ on F.Cu "F.Cu-/HDMI/TMDS_D2+-4" (solid, remove dead copper, pour order 31445): 24 vertices, not listed, extent -39.663,14.383 -39.064,14.958
TMDS_CK+ on F.Cu "F.Cu-/HDMI/TMDS_CK+-5" (solid, remove dead copper, pour order 31446): 24 vertices, not listed, extent -47.163,14.383 -46.564,14.958
TMDS_CK+ on F.Cu "F.Cu-/HDMI/TMDS_CK+-1" (solid, remove dead copper, pour order 31447): 24 vertices, not listed, extent -47.163,13.902 -46.564,14.477
TMDS_D2+ on F.Cu "F.Cu-/HDMI/TMDS_D2+-1" (solid, remove dead copper, pour order 31448): 24 vertices, not listed, extent -39.663,13.902 -39.064,14.477
TMDS_D1+ on F.Cu "F.Cu-/HDMI/TMDS_D1+-5" (solid, remove dead copper, pour order 31449): 24 vertices, not listed, extent -42.163,13.902 -41.564,14.477
TMDS_D0+ on F.Cu "F.Cu-/HDMI/TMDS_D0+-5" (solid, remove dead copper, pour order 31450): 24 vertices, not listed, extent -44.663,13.902 -44.064,14.477
TMDS_D1- on F.Cu "F.Cu-/HDMI/TMDS_D1--6" (solid, remove dead copper, pour order 31451): 24 vertices, not listed, extent -43.306,13.902 -42.707,14.477
TMDS_D2- on F.Cu "F.Cu-/HDMI/TMDS_D2--5" (solid, remove dead copper, pour order 31452): 24 vertices, not listed, extent -40.806,13.902 -40.207,14.477
TMDS_CK- on F.Cu "F.Cu-/HDMI/TMDS_CK-" (solid, remove dead copper, pour order 31453): 24 vertices, not listed, extent -48.306,13.902 -47.707,14.477
TMDS_D0- on F.Cu "F.Cu-/HDMI/TMDS_D0--7" (solid, remove dead copper, pour order 31454): 24 vertices, not listed, extent -45.806,13.902 -45.207,14.477
TMDS_D1- on F.Cu "F.Cu-/HDMI/TMDS_D1--7" (solid, remove dead copper, pour order 31455): 24 vertices, not listed, extent -43.306,14.383 -42.707,14.958
TMDS_D2- on F.Cu "F.Cu-/HDMI/TMDS_D2--3" (solid, remove dead copper, pour order 31456): 24 vertices, not listed, extent -40.806,14.383 -40.207,14.958
TMDS_CK- on F.Cu "F.Cu-/HDMI/TMDS_CK--5" (solid, remove dead copper, pour order 31457): 24 vertices, not listed, extent -48.306,14.383 -47.707,14.958
+3V3 on F.Cu "F.Cu-+3V3-67" (solid, remove dead copper, pour order 31458): 24 vertices, not listed, extent -95.902,25.458 -95.284,26.046
Net-(U6-CKXTAL1) on F.Cu "F.Cu-Net-(U6-CKXTAL1)-2" (solid, remove dead copper, pour order 31459): 24 vertices, not listed, extent -98.051,31.598 -97.463,32.216
GND on F.Cu "F.Cu-GND-19" (solid, remove dead copper, pour order 31460): 24 vertices, not listed, extent -12.468,16.75 -11.739,17.27
TMDS_D1+ on F.Cu "F.Cu-/HDMI/TMDS_D1+-6" (solid, remove dead copper, pour order 31461): 24 vertices, not listed, extent -42.384,17.697 -41.817,18.238
TMDS_D2+ on F.Cu "F.Cu-/HDMI/TMDS_D2+-2" (solid, remove dead copper, pour order 31462): 24 vertices, not listed, extent -39.884,17.697 -39.317,18.238
TMDS_D0+ on F.Cu "F.Cu-/HDMI/TMDS_D0+-2" (solid, remove dead copper, pour order 31463): 24 vertices, not listed, extent -44.891,17.697 -44.324,18.238
TMDS_CK+ on F.Cu "F.Cu-/HDMI/TMDS_CK+-6" (solid, remove dead copper, pour order 31464): 24 vertices, not listed, extent -47.383,17.697 -46.816,18.238
DDI_B_TX0+ on F.Cu "F.Cu-/HDMI/DDI_B_TX0+" (solid, remove dead copper, pour order 31465): 24 vertices, not listed, extent -39.884,19.142 -39.317,19.683
DDI_B_TX2+ on F.Cu "F.Cu-/HDMI/DDI_B_TX2+" (solid, remove dead copper, pour order 31466): 24 vertices, not listed, extent -44.891,19.142 -44.324,19.683
DDI_B_TX1+ on F.Cu "F.Cu-/HDMI/DDI_B_TX1+" (solid, remove dead copper, pour order 31467): 24 vertices, not listed, extent -42.384,19.142 -41.817,19.683
DDI_B_TX3+ on F.Cu "F.Cu-/HDMI/DDI_B_TX3+" (solid, remove dead copper, pour order 31468): 24 vertices, not listed, extent -47.383,19.142 -46.816,19.683
TMDS_D1- on F.Cu "F.Cu-/HDMI/TMDS_D1--2" (solid, remove dead copper, pour order 31469): 24 vertices, not listed, extent -43.053,17.697 -42.486,18.238
TMDS_D2- on F.Cu "F.Cu-/HDMI/TMDS_D2--6" (solid, remove dead copper, pour order 31470): 24 vertices, not listed, extent -40.553,17.697 -39.986,18.238
TMDS_D0- on F.Cu "F.Cu-/HDMI/TMDS_D0--6" (solid, remove dead copper, pour order 31471): 24 vertices, not listed, extent -45.56,17.697 -44.993,18.238
DDI_B_TX2- on F.Cu "F.Cu-/HDMI/DDI_B_TX2-" (solid, remove dead copper, pour order 31472): 24 vertices, not listed, extent -45.56,19.142 -44.993,19.683
DDI_B_TX0- on F.Cu "F.Cu-/HDMI/DDI_B_TX0-" (solid, remove dead copper, pour order 31473): 24 vertices, not listed, extent -40.553,19.142 -39.986,19.683
DDI_B_TX3- on F.Cu "F.Cu-/HDMI/DDI_B_TX3-" (solid, remove dead copper, pour order 31474): 24 vertices, not listed, extent -48.052,19.142 -47.485,19.683
DDI_B_TX1- on F.Cu "F.Cu-/HDMI/DDI_B_TX1-" (solid, remove dead copper, pour order 31475): 24 vertices, not listed, extent -43.053,19.142 -42.486,19.683
CON_USB4_D_N on F.Cu "F.Cu-/USB2.0&USB3.0/CON_USB4_D_N-1" (solid, remove dead copper, pour order 31476): 24 vertices, not listed, extent -117.017,17.185 -116.4,17.736
Net-(U13-K) on F.Cu "F.Cu-Net-(U13-K)-2" (solid, remove dead copper, pour order 31477): 24 vertices, not listed, extent -34.92,6.542 -34.4,7.133
Net-(Q7-G) on F.Cu "F.Cu-Net-(Q7-G)-7" (solid, remove dead copper, pour order 31478): 24 vertices, not listed, extent -32.04,6.632 -31.52,7.223
Net-(U13-K) on F.Cu "F.Cu-Net-(U13-K)-1" (solid, remove dead copper, pour order 31479): 24 vertices, not listed, extent -34.92,6.933 -34.4,7.524
Net-(Q5-G) on F.Cu "F.Cu-Net-(Q5-G)-2" (solid, remove dead copper, pour order 31480): 24 vertices, not listed, extent -33.9,5.953 -33.38,6.543
GND on F.Cu "F.Cu-GND-159" (solid, remove dead copper, pour order 31481): 24 vertices, not listed, extent -108.145,12.885 -107.554,13.475
GND on F.Cu "F.Cu-GND-116" (solid, remove dead copper, pour order 31482): 24 vertices, not listed, extent -104.726,12.885 -104.135,13.475
CC1 on F.Cu "F.Cu-/PSU/CC1-3" (solid, remove dead copper, pour order 31483): 24 vertices, not listed, extent -13.886,5.795 -13.295,6.385
+3V3 on F.Cu "F.Cu-+3V3-47" (solid, remove dead copper, pour order 31484): 24 vertices, not listed, extent -105.57,66.729 -105.05,67.32
+3V3 on F.Cu "F.Cu-+3V3-75" (solid, remove dead copper, pour order 31485): 24 vertices, not listed, extent -3.02,28.13 -2.502,28.721
Net-(D22-A) on F.Cu "F.Cu-Net-(D22-A)" (solid, remove dead copper, pour order 31486): 24 vertices, not listed, extent -133.178,90.139 -132.631,90.768
Net-(Q8-G) on F.Cu "F.Cu-Net-(Q8-G)-3" (solid, remove dead copper, pour order 31487): 24 vertices, not listed, extent -131.793,88.935 -131.242,89.558
Net-(U14-VDD) on F.Cu "F.Cu-Net-(U14-VDD)-1" (solid, remove dead copper, pour order 31488): 24 vertices, not listed, extent -13.741,8.161 -13.15,8.699
GND on F.Cu "F.Cu-GND-115" (solid, remove dead copper, pour order 31489): 24 vertices, not listed, extent -98.131,92.79 -96.813,93.79
GND on F.Cu "F.Cu-GND-29" (solid, remove dead copper, pour order 31490): 24 vertices, not listed, extent -81.291,92.8 -79.973,93.8
GND on F.Cu "F.Cu-GND-184" (solid, remove dead copper, pour order 31491): 24 vertices, not listed, extent -83.831,92.8 -82.513,93.8
GND on F.Cu "F.Cu-GND-124" (solid, remove dead copper, pour order 31492): 24 vertices, not listed, extent -95.591,92.79 -94.273,93.79
HSIO_0_TX- on F.Cu "F.Cu-/LattePanda Module/HSIO_0_TX--1" (solid, remove dead copper, pour order 31493): 24 vertices, not listed, extent -120.251,20.456 -119.69,20.998
CON_USB3_SSTX_N on F.Cu "F.Cu-/USB2.0&USB3.0/CON_USB3_SSTX_N" (solid, remove dead copper, pour order 31494): 24 vertices, not listed, extent -120.251,19.027 -119.69,19.568
HSO+ on F.Cu "F.Cu-/Gigabit Ethernet/HSO+" (solid, remove dead copper, pour order 31495): 24 vertices, not listed, extent -89.944,33.814 -89.382,34.356
HSIO_0_TX+ on F.Cu "F.Cu-/LattePanda Module/HSIO_0_TX+-1" (solid, remove dead copper, pour order 31496): 24 vertices, not listed, extent -120.915,20.456 -120.353,20.998
HSO- on F.Cu "F.Cu-/Gigabit Ethernet/HSO--1" (solid, remove dead copper, pour order 31497): 24 vertices, not listed, extent -90.608,33.814 -90.046,34.356
CON_USB3_SSTX_P on F.Cu "F.Cu-/USB2.0&USB3.0/CON_USB3_SSTX_P-5" (solid, remove dead copper, pour order 31498): 24 vertices, not listed, extent -120.915,19.027 -120.353,19.568
GbE_PCIe_RX+ on F.Cu "F.Cu-/Gigabit Ethernet/GbE_PCIe_RX+-2" (solid, remove dead copper, pour order 31499): 24 vertices, not listed, extent -89.944,35.244 -89.382,35.785
GbE_PCIe_RX- on F.Cu "F.Cu-/Gigabit Ethernet/GbE_PCIe_RX--2" (solid, remove dead copper, pour order 31500): 24 vertices, not listed, extent -90.608,35.244 -90.046,35.785
Net-(U6-CKXTAL1) on F.Cu "F.Cu-Net-(U6-CKXTAL1)-1" (solid, remove dead copper, pour order 31501): 24 vertices, not listed, extent -96.989,29.731 -96.377,30.286
Net-(U6-CKXTAL1) on F.Cu "F.Cu-Net-(U6-CKXTAL1)-3" (solid, remove dead copper, pour order 31502): 24 vertices, not listed, extent -97.374,29.726 -96.768,30.282
Net-(U6-LANWAKEB) on F.Cu "F.Cu-Net-(U6-LANWAKEB)" (solid, remove dead copper, pour order 31503): 24 vertices, not listed, extent -92.829,33.815 -92.223,34.372
Net-(U6-ISOLATEB) on F.Cu "F.Cu-Net-(U6-ISOLATEB)" (solid, remove dead copper, pour order 31504): 24 vertices, not listed, extent -91.879,33.825 -91.273,34.382
+BATT on F.Cu "F.Cu-+BATT-1" (solid, remove dead copper, pour order 31505): 24 vertices, not listed, extent -106.242,77.816 -105.686,78.422
Net-(Q8-G) on F.Cu "F.Cu-Net-(Q8-G)-2" (solid, remove dead copper, pour order 31506): 24 vertices, not listed, extent -132.802,87.668 -132.246,88.274
GND on F.Cu "F.Cu-GND-129" (solid, remove dead copper, pour order 31507): 24 vertices, not listed, extent -99.194,32.099 -98.656,32.69
+12V on F.Cu "F.Cu-+12V-4" (solid, remove dead copper, pour order 31508): 24 vertices, not listed, extent -33.039,7.561 -32.501,8.153
+3V3 on F.Cu "F.Cu-+3V3-10" (solid, remove dead copper, pour order 31509): 24 vertices, not listed, extent -88.849,27.8 -88.311,28.391
+12V on F.Cu "F.Cu-+12V-8" (solid, remove dead copper, pour order 31510): 24 vertices, not listed, extent -33.039,6.973 -32.501,7.564
Net-(Q5-G) on F.Cu "F.Cu-Net-(Q5-G)" (solid, remove dead copper, pour order 31511): 24 vertices, not listed, extent -33.651,4.383 -33.09,4.942
Net-(Q7-G) on F.Cu "F.Cu-Net-(Q7-G)-5" (solid, remove dead copper, pour order 31512): 24 vertices, not listed, extent -31.811,7.283 -31.25,7.842
+3V3 on F.Cu "F.Cu-+3V3-42" (solid, remove dead copper, pour order 31513): 24 vertices, not listed, extent -106.86,69.986 -106.299,70.546
+3V3 on F.Cu "F.Cu-+3V3-1" (solid, remove dead copper, pour order 31514): 24 vertices, not listed, extent -106.86,52.98 -106.299,53.54
+3V3 on F.Cu "F.Cu-+3V3-59" (solid, remove dead copper, pour order 31515): 24 vertices, not listed, extent -106.86,70.91 -106.299,71.47
+1V0 on F.Cu "F.Cu-+1V0-6" (solid, remove dead copper, pour order 31516): 24 vertices, not listed, extent -96.855,28.054 -96.342,28.628
HPD on F.Cu "F.Cu-/HDMI/HPD" (solid, remove dead copper, pour order 31517): 24 vertices, not listed, extent -53.591,15.568 -53.068,16.118
Net-(U14-VDD) on F.Cu "F.Cu-Net-(U14-VDD)-2" (solid, remove dead copper, pour order 31518): 24 vertices, not listed, extent -13.36,8.18 -12.769,8.7
DDC_SCL on F.Cu "F.Cu-/HDMI/DDC_SCL-4" (solid, remove dead copper, pour order 31519): 24 vertices, not listed, extent -50.486,16.9 -49.895,17.42
CC2 on F.Cu "F.Cu-/PSU/CC2-4" (solid, remove dead copper, pour order 31520): 24 vertices, not listed, extent -9.018,5.546 -8.344,6.114
CON_PCIE_TX_1+ on F.Cu "F.Cu-/M.2 E&M Key/CON_PCIE_TX_1+-1" (solid, remove dead copper, pour order 31521): 24 vertices, not listed, extent -106.801,44.031 -106.26,44.599
CON_PCIE_TX_1- on F.Cu "F.Cu-/M.2 E&M Key/CON_PCIE_TX_1--1" (solid, remove dead copper, pour order 31522): 24 vertices, not listed, extent -106.801,43.361 -106.26,43.929
HSIO_2_TX- on F.Cu "F.Cu-/LattePanda Module/HSIO_2_TX-" (solid, remove dead copper, pour order 31523): 24 vertices, not listed, extent -105.381,43.361 -104.839,43.929
HSIO_2_TX+ on F.Cu "F.Cu-/LattePanda Module/HSIO_2_TX+-1" (solid, remove dead copper, pour order 31524): 24 vertices, not listed, extent -105.381,44.031 -104.839,44.599
GND on F.Cu "F.Cu-GND-63" (solid, remove dead copper, pour order 31525): 24 vertices, not listed, extent -93.555,35.289 -92.995,35.85
CON_PCIE_TX_0- on F.Cu "F.Cu-/M.2 E&M Key/CON_PCIE_TX_0-" (solid, remove dead copper, pour order 31526): 24 vertices, not listed, extent -106.803,58.736 -106.262,59.301
PCIE30_TX1_P on F.Cu "F.Cu-/PCIe x4/PCIE30_TX1_P" (solid, remove dead copper, pour order 31527): 24 vertices, not listed, extent -126.773,33.086 -126.232,33.651
PCIE30_TX0_P on F.Cu "F.Cu-/PCIe x4/PCIE30_TX0_P" (solid, remove dead copper, pour order 31528): 24 vertices, not listed, extent -126.773,37.096 -126.232,37.661
PCIE30_TX3_P on F.Cu "F.Cu-/PCIe x4/PCIE30_TX3_P" (solid, remove dead copper, pour order 31529): 24 vertices, not listed, extent -126.783,25.106 -126.242,25.671
PCIE30_TX0_N on F.Cu "F.Cu-/PCIe x4/PCIE30_TX0_N" (solid, remove dead copper, pour order 31530): 24 vertices, not listed, extent -126.773,36.429 -126.232,36.994
PCIE30_TX1_N on F.Cu "F.Cu-/PCIe x4/PCIE30_TX1_N-1" (solid, remove dead copper, pour order 31531): 24 vertices, not listed, extent -126.773,32.419 -126.232,32.984
CON_PCIE_TX_0+ on F.Cu "F.Cu-/M.2 E&M Key/CON_PCIE_TX_0+-1" (solid, remove dead copper, pour order 31532): 24 vertices, not listed, extent -106.803,58.069 -106.262,58.634
PCIE30_TX3_N on F.Cu "F.Cu-/PCIe x4/PCIE30_TX3_N" (solid, remove dead copper, pour order 31533): 24 vertices, not listed, extent -126.783,24.439 -126.242,25.004
HSIO_11_TX+ on F.Cu "F.Cu-/LattePanda Module/HSIO_11_TX+" (solid, remove dead copper, pour order 31534): 24 vertices, not listed, extent -125.358,25.106 -124.817,25.671
HSIO_9_TX+ on F.Cu "F.Cu-/LattePanda Module/HSIO_9_TX+-2" (solid, remove dead copper, pour order 31535): 24 vertices, not listed, extent -125.348,33.086 -124.807,33.651
HSIO_8_TX+ on F.Cu "F.Cu-/LattePanda Module/HSIO_8_TX+-2" (solid, remove dead copper, pour order 31536): 24 vertices, not listed, extent -125.348,37.096 -124.807,37.661